# Altium PCB ife19_TS_Charger.PcbDoc
Units mm, origin at the board's own origin, x right, y up, seen from the top; angles counter-clockwise.
Board outline 49.35 x 26.35 mm, 2 copper layers (Top Layer, Bottom Layer); 22 components, 15 nets, 72 pads, 25 vias.
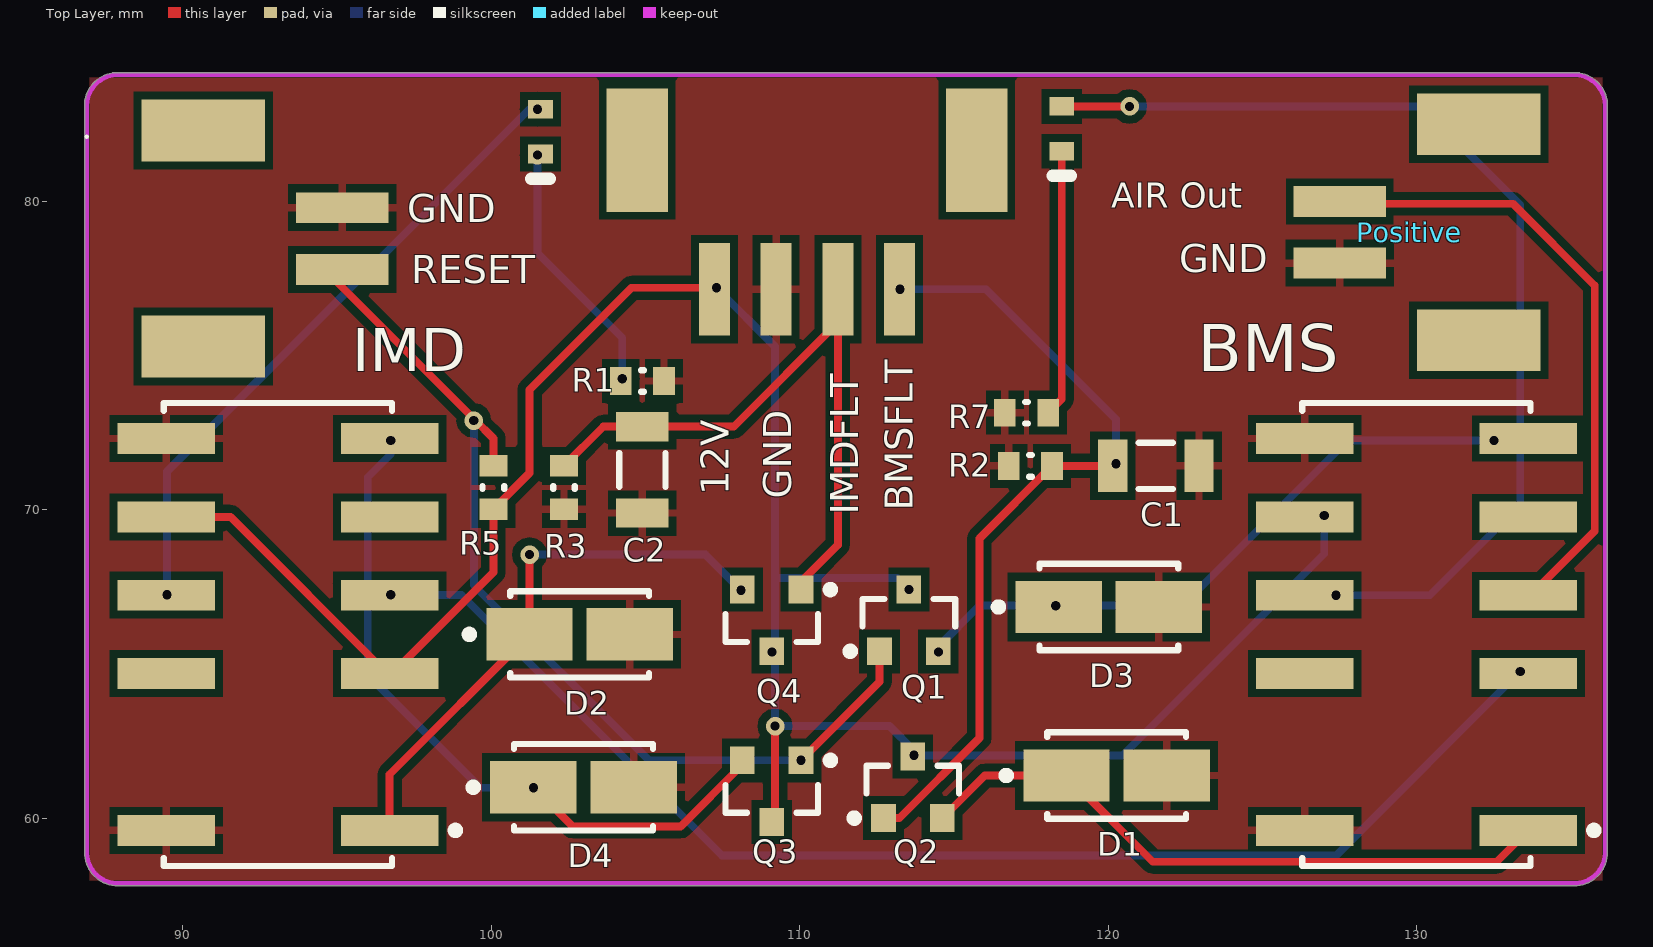
[diagram p0: Top Layer view]
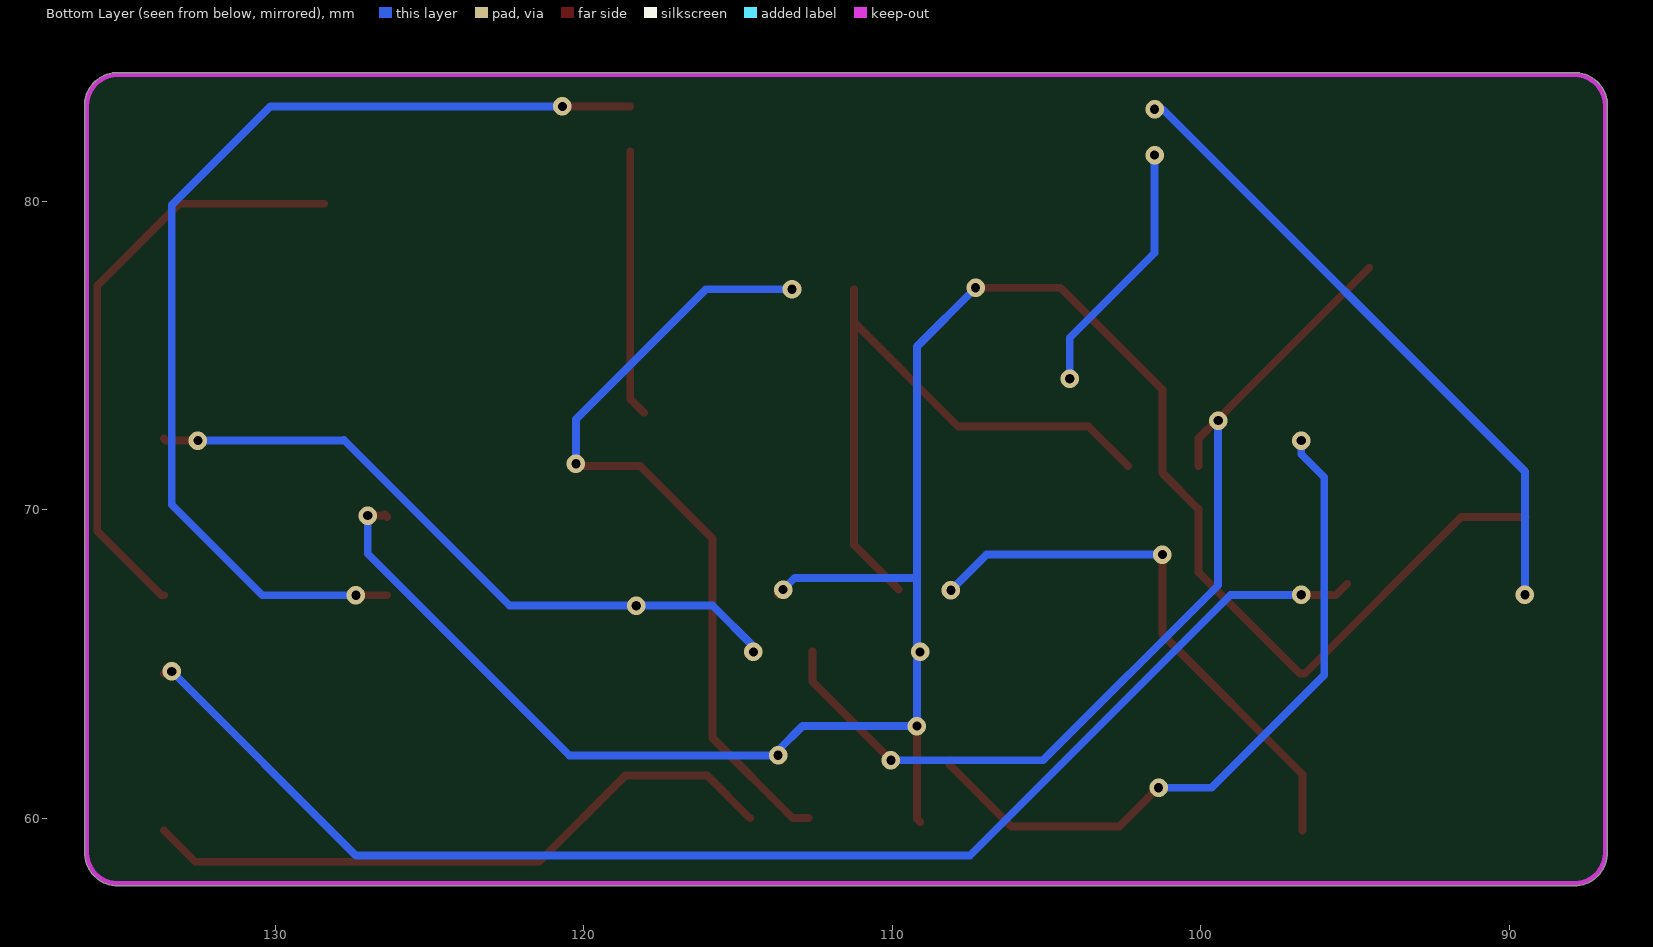
[diagram p1: Bottom Layer view, seen from below]

## Layer stack, top to bottom
Top Solder: solder mask 0.0102, Solder Resist, Dk 3.5
Top Layer: signal copper 0.0356
Dielectric 1: dielectric 0.32, FR-4, Dk 4.8
Bottom Layer: signal copper 0.0356
Bottom Solder: solder mask 0.0102, Solder Resist, Dk 3.5

## Board outline
86.825,58.9 ccw(c87.9,58.9) 87.899,57.825 ccw(c87.9,58.9) 87.9,57.825 135.1,57.825 ccw(c135.1,58.9) 136.175,58.9 136.175,83.1 ccw(c135.1,83.1) 135.1,84.175 87.9,84.175 ccw(c87.9,83.1) 86.825,83.1

## Design rules (kind name [scope] priority, off if disabled: settings)
Clearance [All] p1: gap=0.152 ignorepadtopadclearanceinfootprint=FALSE
PolygonConnect [All] p1: connectstyle=Relief reliefconductorwidth=0.254 reliefentries=4 polygonreliefangle="90 Angle" airgapwidth=0.254
RoutingVias [All] p1: holewidth=0.3 width=0.6 viastyle="Through Hole" minholewidth=0.3 minwidth=0.6 maxholewidth=6.3 maxwidth=10
SolderMaskExpansion [All] p1: expansion=0.102
Width [All] p1: maxlimit=0.254 minlimit=0.254 preferedwidth=0.254
30 further rules are at their usual default settings.

## Components (designator, comment, footprint, x,y, rotation, side; value= is the part's Value field where it differs from the comment)
12V "TXS2SA-LT-12V-Z" PNSC-TXS2SA-L2_V 93.091,65.968 r90 top (schematic designator K1)
BMS "TLMY1100-GS08" VISH-TLMX1100-2_V 118.491,82.351 r270 top (schematic designator DS2)
C1 "CAP 10uF 10V 1206(3216)" CAPC1206(3216)130_L 121.539,71.429 r0 top value=10uF
C2 "CAP 10uF 10V 1206(3216)" CAPC1206(3216)130_L 104.902,71.302 r270 top value=10uF
D1 "SMAJ12A-E3/5A" VISH-DO-214AC-2_M 120.269,61.396 r0 top
D2 "SMAJ12A-E3/5A" VISH-DO-214AC-2_M 102.87,65.968 r0 top
D3 "SMAJ12A-E3/5A" VISH-DO-214AC-2_M 120.015,66.857 r0 top
D4 "SMAJ12A-E3/5A" VISH-DO-214AC-2_M 102.997,61.015 r0 top
GND "Molex 505575-02 2 Position 2.00mm pitch connector wire to board connector Datasheet" 505575-02 94.678,78.796 r90 top (schematic designator 3)
IMD "TLMY1100-GS08" VISH-TLMX1100-2_V 101.6,82.261 r270 top (schematic designator DS1)
IMDFLT "TXS2SA-LT-12V-Z" PNSC-TXS2SA-L2_V 129.984,65.968 r90 top (schematic designator K2)
Positive "Molex 505575-02 2 Position 2.00mm pitch connector wire to board connector Datasheet" 505575-02 128,79 r270 top (schematic designator 1)
Q1 "DMP3098L-7" DIOD-SOT23-3_V 113.538,66.421 r90 top
Q2 "DMP3098L-7" DIOD-SOT23-3_V 113.665,61.015 r90 top
Q3 "DMP3098L-7" DIOD-SOT23-3_V 109.093,60.888 r270 top
Q4 "DMP3098L-7" DIOD-SOT23-3_V 109.093,66.421 r270 top
R1 "510 1% 0603(1608)" RESC0603(1608)_L 104.902,74.18 r180 top value="249000.00 Ohm"
R2 "10K 1% 0603(1608)" RESC0603(1608)_L 117.475,71.429 r0 top value="249000.00 Ohm"
R3 "10K 1% 0603(1608)" RESC0603(1608)_L 102.362,70.729 r90 top value="249000.00 Ohm"
R5 "1k 1% 0603(1608)" RESC0603(1608)_L 100.076,70.729 r90 top value="249000.00 Ohm"
R7 "510 1% 0603(1608)" RESC0603(1608)_L 117.348,73.152 r0 top value="249000.00 Ohm"
RESET "Molex 505575-04 4 Position 2.00mm pitch connector wire to board connector Datasheet" 505575-04 110.236,77.652 r0 top (schematic designator 2)

## Footprints (in the part's own frame and the unit in brackets; to place one, negate y for a bottom-side part, rotate by r counter-clockwise, add the part's x,y. Pads: shape width x height; smd on the part's side, far side on the other; paste and mask are expansions set on the pad)
505575-02 [mm]
  rect 1x3 smd: 1(-1,-0.5) 2(1,-0.5)
  rect 2x4 smd: P$3(-3.5,4) P$4(3.5,4)
505575-04 [mm]
  rect 1x3 smd: 1(-3,-0.5) 2(-1,-0.5) 3(1,-0.5) 4(3,-0.5)
  rect 2x4 smd: P$3(-5.5,4) P$4(5.5,4)
CAPC1206(3216)130_L [mm] "Chip Capacitor, Body 3.2x1.6mm, Height 1.3mm, IPC High Density"
  rect 0.95x1.7 smd: 1(-1.4,0) 2(1.4,0)
  silkscreen extent -0.55,-0.75 0.55,0.75, body extent -1.7,-0.9 1.7,0.9, height 1.3
DIOD-SOT23-3_V [mm] "SOT23, 3-Leads, Body 3x1.4mm, Pitch 0.95mm"
  rect 0.9x0.8 smd: 1(-1,0.95) 2(-1,-0.95) 3(1,0)
  silkscreen extent -1.12,-1.5 0.7,2.02, body extent -1.25,-1.5 1.25,1.5, height 1.1
PNSC-TXS2SA-L2_V [mm] "SMD, 10-Leads, Body 15x7.4mm, Pitch 2.54mm"
  rect 1x3.16 smd: 1(-6.35,-3.62) 3(-1.27,-3.62) 4(1.27,-3.62) 5(3.81,-3.62) 6(6.35,-3.62) 7(6.35,3.62) 8(3.81,3.62) 9(1.27,3.62) 10(-1.27,3.62) 12(-6.35,3.62)
  silkscreen extent -7.5,-5.88 7.5,3.7
RESC0603(1608)_L [mm] "Chip Resistor, Body 1.6x0.8mm, IPC High Density"
  rect 0.7x0.9 smd: 1(-0.7,0) 2(0.7,0)
  silkscreen extent -0.05,-0.35 0.05,0.35, body extent -0.85,-0.47 0.85,0.47, height 0.6
VISH-DO-214AC-2_M [mm] "DO-214AC, 2-Leads, Body 4.5x2.79mm, IPC Low Density"
  rect 2.8x1.7 smd: 1(-1.625,0) 2(1.625,0)
  silkscreen extent -3.7,-1.4 2.25,1.4, body extent -2.25,-1.39 2.25,1.4, height 2.29
VISH-TLMX1100-2_V [mm] "SMD, 2-Leads, Body 1.6x0.8mm"
  rect 0.6x0.8 smd: 1(-0.725,0) 2(0.725,0)
  silkscreen extent 1.53,-0.3 1.53,0.3, body extent -0.8,-0.4 0.8,0.4, height 0.65

## Part data
12V IMDFLT: library part CMP-2000-07338-1, "Very High Sensitivity, Relay, 70 mW, 3 V, 10-Pin SMD, RoHS, Tape and Reel", Coil Current=23.3mA, Coil Power=70mW, Coil Resistance=129Ohms, Coil Voltage=3VDC, Contact Rating (Current)=1A, Manufacturer=Panasonic, Operating Temperature=-40°C~70°C, Package Description="10-Pin Surface Mount Device, Body 15 x 7.4 mm, Pitch 2.54 mm", Package Reference=TXS2SA-L2, Standard Package=500, Switching Voltage=110VDC-Max, Turn On Voltage (Max)=2.4VDC, Catalog Drawings="TX,TXSSeriesSMD /  / TX,TXSSeriesCircuitL2", Category=Relays, Coil Type=Latching,DualCoil, Contact Form=DPDT(2FormC), Contact Material=Silver(Ag),Gold(Au), Datasheet URL=http://www.panasonic-electric-works.com/eu-asset/en/downloads/ds_61022_en_txs.pdf, Datasheet Version=02/2014, Dynamic Catalog=TX-SSeries, Family=SignalRelays,Upto2Amps, Features=Sealed-Fully, Manufacturer URL=http://www.panasonic.com/, Mounting Technology=SurfaceMount, Mounting Type=SurfaceMount, Operate Time=5ms, Other Names="255-2347-2 / TXS2SA-L2-3V-Z-ND", Other Related Documents="RelayTechnicalInfo /  / StandardsChart /  / HowtoReadDateCodes", Packaging=Tape&Reel(TR), Relay Type=GeneralPurpose, Release Time=5ms, Series=TX-S, Termination Style=GullWing
BMS IMD: library part CMP-1666-00030-1, "Yellow LED, 20 mA, 2.1 V, -40 to 100 degC, 2-Pin SMD (0603), RoHS, Tape and Reel", ComponentLink1Description="Manufacturer URL", ComponentLink1URL=http://www.vishay.com/, ComponentLink2Description=Datasheet, ComponentLink2URL=http://download.siliconexpert.com/pdfs/2016/8/7/12/43/26/667/vsh_/manual/379263299541529tlmb1100.pdf, DatasheetVersion="Rev. 2.7, 03/2016", PackageDescription="2-Pin Surface Mount Device, Body 1.6 x 0.8 mm", PackageReference=0603
C1 C2: library part CMP-1037-04970-1, "CAP 10uF 10V -20% to +80% 1206 (3216 Metric) Thickness 1.3mm SMD", Case-EIA=1206, Case-Metric=3216, Rated Voltage="10 V", Tolerance="-20% to +80%", Max Thickness="1.3 mm", Technology=SMT
D1 D2 D3 D4: library part CMP-0548-00315-2, "Transient Voltage Suppressor, 6.40 to 231 V, 12 V Stand-off Voltage, Uni-Directional, -55 to 155 degC, 2-pin DO-214AC, Pb-Free, Tape and Reel", Manufacturer="Vishay Semiconductor", Operating Junction and Storage Temperature Range="-55 to 150 degC", ComponentLink1Description="Manufacturer URL", ComponentLink1URL=http://www.vishay.com/, ComponentLink2Description=Datasheet, ComponentLink2URL=http://www.vishay.com/docs/88390/smaj50a.pdf, ComponentLink3Description="Package Specification", ComponentLink3URL=http://www.vishay.com/docs/88390/smaj50a.pdf, DatasheetVersion=12/8/2013, ID (uA)=1, IFSM="40 A", Mounting Technology="Surface Mount", PackageDescription="2-Pin DO-214AC (SMA), Body 4.245 x 2.665 mm", PackageReference=DO-214AC-2, Packing="Tape and Reel", PartNumber=SMAJ12A-E3/5A, PPPM (W)="400, 300", RoHS=TRUE, VBR Uni-Directional (V)="6.4 to 231", VWM (V)=12
GND Positive: library part 505575-02, DeviceSetName=505575-02, GateName_1=G$1, LibraryName="MOLEX Micro-Lock", Package=505575-02, SymbolName_1=2POS
Q1 Q2 Q3 Q4: library part CMP-0697-00001-2, "P-Channel Enhancement Mode MOSFET, -30 V VDS, -55 to 155 degC, 3-Pin SOT23, RoHS, Tape and Reel", Manufacturer="Diodes Inc", Operating Temperature Range="-55 to 150 degC", ComponentLink1Description="Manufacturer URL", ComponentLink1URL=http://www.diodes.com/, ComponentLink2Description=Datasheet, ComponentLink2URL=http://www.diodes.com/datasheets/ds31447.pdf, ComponentLink3Description="Package Specification", ComponentLink3URL=http://www.diodes.com/datasheets/ap02002.pdf, DatasheetVersion="Rev. 8 - 2", IDS (TA="25 degC)=-3.8 A", Mounting Technology="Surface Mount", PackageDescription="3-Pin Small Outline Transistor, Body 1.3 x 2.9 mm, Pitch 0.95 mm", PackageReference=SOT23, PackageVersion="Rev. 75", Packing="Tape and Reel", PartNumber=DMP3098L-7, PD (TA="25 degC)=1.08 W", RDS(on) (Max.) (VGS="4.5 V)=120 mOhm", RoHS=TRUE, VDS="-30 V", VGS="+/- 20 V", VGS(th) (Max.)="-2.1 V"
R1 R2 R3 R5 R7: library part CMP-1012-00779-1, "249K 0.1W 1% 0603 (1608 Metric)  SMD", Case-EIA=0603, Case-Metric=1608, Power="0.1 W", Tolerance="1 %", Technology=SMT
RESET: library part 505575-04, DeviceSetName=505575-04, GateName_1=G$1, LibraryName="MOLEX Micro-Lock", Package=505575-04, SymbolName_1=4POS

## Via types
v1: diameter 0.6, hole 0.3, Top Layer to Bottom Layer, 25 vias

## Nets (pads, with @x,y where several pads share a name; then routed paths per layer and width w, separated by ;. In a path a pad name is that pad's centre, name@x,y a point inside that pad or via, vN(x,y) a via of type N, cw(c..) or ccw(c..) an arc to the next point about the centre after c; other vN are vias at no path point)
12V: 12V.3 12V.8 IMDFLT.8 Q1.3 Q2.3 Q3.3 Q4.3 R5.1 RESET.1 | length 73.9
  Top Layer w0.254: 12V.8 91.552,69.778 96.632,64.698 12V.3 96.79,64.698 100.076,67.984 R5.1 101.245,71.198 101.245,73.894 104.551,77.2 RESET.1@107.284,77.2 ; RESET.1 RESET.1@107.284,77.2 ; v1(107.3,77.2) RESET.1@107.284,77.2 ; Q3.3 109.2,59.995 v1(109.2,63) ; v1(113.538,67.421) Q1.3@113.7,67.259 ; Q2.3 113.63,62.049 v1(113.7,62.049) ; IMDFLT.8 126.436,69.85 126.466,69.82 v1(127,69.82)
  Bottom Layer w0.254: v1(107.3,77.2) 109.2,75.3 109.2,67.8 ; v1(113.538,67.421) 113.159,67.8 109.2,67.8 ; v1(127,69.82) 127,68.58 120.469,62.049 v1(113.7,62.049) 113.7,62.211 112.911,63 v1(109.2,63) 109.2,67.8
  other v1: 109.1,65.4
BMSFLT: C1.1 Q2.1 R2.2 RESET.4 | length 26.4
  Top Layer w0.254: Q2.1 113.226,60.015 115.824,62.613 115.824,69.078 R2.2 C1.1 120.324,71.429 120.253,71.5 v1(120.25,71.5) ; RESET.4 v1(113.25,77.152)
  Bottom Layer w0.254: v1(113.25,77.152) 116.036,77.152 120.25,72.938 v1(120.25,71.5)
BMSLED: BMS.1 IMDFLT.9 | length 34.1
  Top Layer w0.254: BMS.1 v1(120.687,83.076) ; IMDFLT.9 v1(127.381,67.238)
  Bottom Layer w0.254: v1(120.687,83.076) 130.157,83.076 133.35,79.883 133.35,70.17 130.418,67.238 v1(127.381,67.238)
GND: 12V.7 12V.12 C1.2 C2.2 D1.2 D2.2 D3.2 D4.2 GND.2 IMDFLT.7 IMDFLT.12 Positive.2 R1.1 R2.1 R3.1 R7.1 RESET.2
IMDFLT: C2.1 Q4.1 R3.2 RESET.3 | length 21.1
  Top Layer w0.254: R3.2 103.635,72.702 C2.1 107.865,72.702 RESET.3@111.236,76.073 ; Q4.1@109.789,67.421 111.236,68.868 RESET.3@111.236,76.073 ; RESET.3 RESET.3@111.236,76.073
IMDLED: 12V.9 IMD.1 | length 21
  Top Layer w0.254: 12V.9 89.483,67.25 v1(89.5,67.25) ; v1(101.5,82.986) IMD.1
  Bottom Layer w0.254: v1(89.5,67.25) 89.5,71.25 101.236,82.986 v1(101.5,82.986)
Net1_1: IMDFLT.4 Positive.1 | length 19.4
  Top Layer w0.254: Positive.1@128.405,79.922 133.112,79.922 135.763,77.271 135.763,69.318 133.683,67.238 IMDFLT.4
NetD1_1: D1.1 IMDFLT.1 Q2.2 | length 21.1
  Top Layer w0.254: Q2.2 115.996,61.396 D1.1 121.438,58.602 132.588,58.602 IMDFLT.1
NetD2_1: 12V.1 D2.1 Q4.2 | length 18.1
  Top Layer w0.254: 12V.1 96.711,61.434 D2.1 v1(101.245,68.554)
  Bottom Layer w0.254: v1(101.245,68.554) 106.946,68.554 v1(108.1,67.4)
NetD3_1: D3.1 IMDFLT.6 Q1.2 | length 22.1
  Top Layer w0.254: Q1.2 114.5,65.409 v1(114.5,65.4) ; v1(132.5,72.25) 133.536,72.25 IMDFLT.6
  Bottom Layer w0.254: v1(114.5,65.4) 114.5,65.579 115.821,66.9 v1(118.3,66.9) 122.399,66.9 127.762,72.263 127.775,72.25 v1(132.5,72.25)
NetD4_1: 12V.6 D4.1 Q3.2 | length 23.1
  Top Layer w0.254: 12V.6 96.75,72.279 v1(96.75,72.25) ; D4.1 102.642,59.745 106.141,59.745 108.143,61.747 Q3.2
  Bottom Layer w0.254: v1(96.75,72.25) 96.75,71.81 96,71.06 96,64.655 99.655,61 v1(101.372,61)
NetDS1_2: IMD.2 R1.2 | length 8.4
  Bottom Layer w0.254: v1(101.5,81.5) 101.5,78.332 104.25,75.582 v1(104.25,74.25)
NetDS2_2: BMS.2 R7.2 | length 8.7
  Top Layer w0.254: R7.2 118.491,73.595 BMS.2
NetK1_4: 12V.4 IMDFLT.3 | length 45.5
  Top Layer w0.254: 12V.4@95.258,67.611 95.631,67.238 12V.4 ; 12V.4@95.758,67.25 v1(96.75,67.25) ; v1(133.35,64.77) 133.532,64.77 IMDFLT.3
  Bottom Layer w0.254: v1(96.75,67.25) 99.037,67.25 107.487,58.8 127.38,58.8 v1(133.35,64.77)
RESET: GND.1 Q1.1 Q3.1 R5.2 | length 31.6
  Top Layer w0.254: GND.1@94.543,77.851 99.469,72.925 100.076,72.318 R5.2 ; v1(110.043,61.888) 112.588,64.433 Q1.1
  Bottom Layer w0.254: v1(99.441,72.898) 99.441,67.564 105.117,61.888 v1(110.043,61.888)
pads on no net: 12V.5 12V.10 GND.P$3 GND.P$4 IMDFLT.5 IMDFLT.10 Positive.P$3 Positive.P$4 RESET.P$3 RESET.P$4

## Polygon pours and split planes (outlines as drawn)
GND on Top Layer "Top Layer-GND" (solid, remove dead copper, pour order 0): 87,58 87,84 136,84 136,58

## Keep-outs
Keep-Out Layer:
  lines w0.15: 87.9,57.9 cw(c87.9,58.9) 86.9,58.9 86.9,83.1 cw(c87.9,83.1) 87.9,84.1 135.1,84.1 cw(c135.1,83.1) 136.1,83.1 136.1,58.9 cw(c135.1,58.9) 135.1,57.9 ; 87.9,57.9 135.1,57.9 ; 87.9,57.9 87.9,57.9 ; 135.1,57.9 135.1,57.9

## Silkscreen, mask and mechanical layers (free items; w line width, h text height)
Top Overlay:
  lines w0.15: 86.9,82.1 86.9,82.1
  text "AIR Out" at 120.1,79.8 h0.81
  text "GND" at 122.3,77.7 h0.91
  text "GND" at 109.728,70.358 h0.91 r90
  text "BMSFLT" at 113.665,69.977 h0.91 r90